# EAGLE board UDB5-Panel-v10 (EAGLE 6.4), part 1 of 4
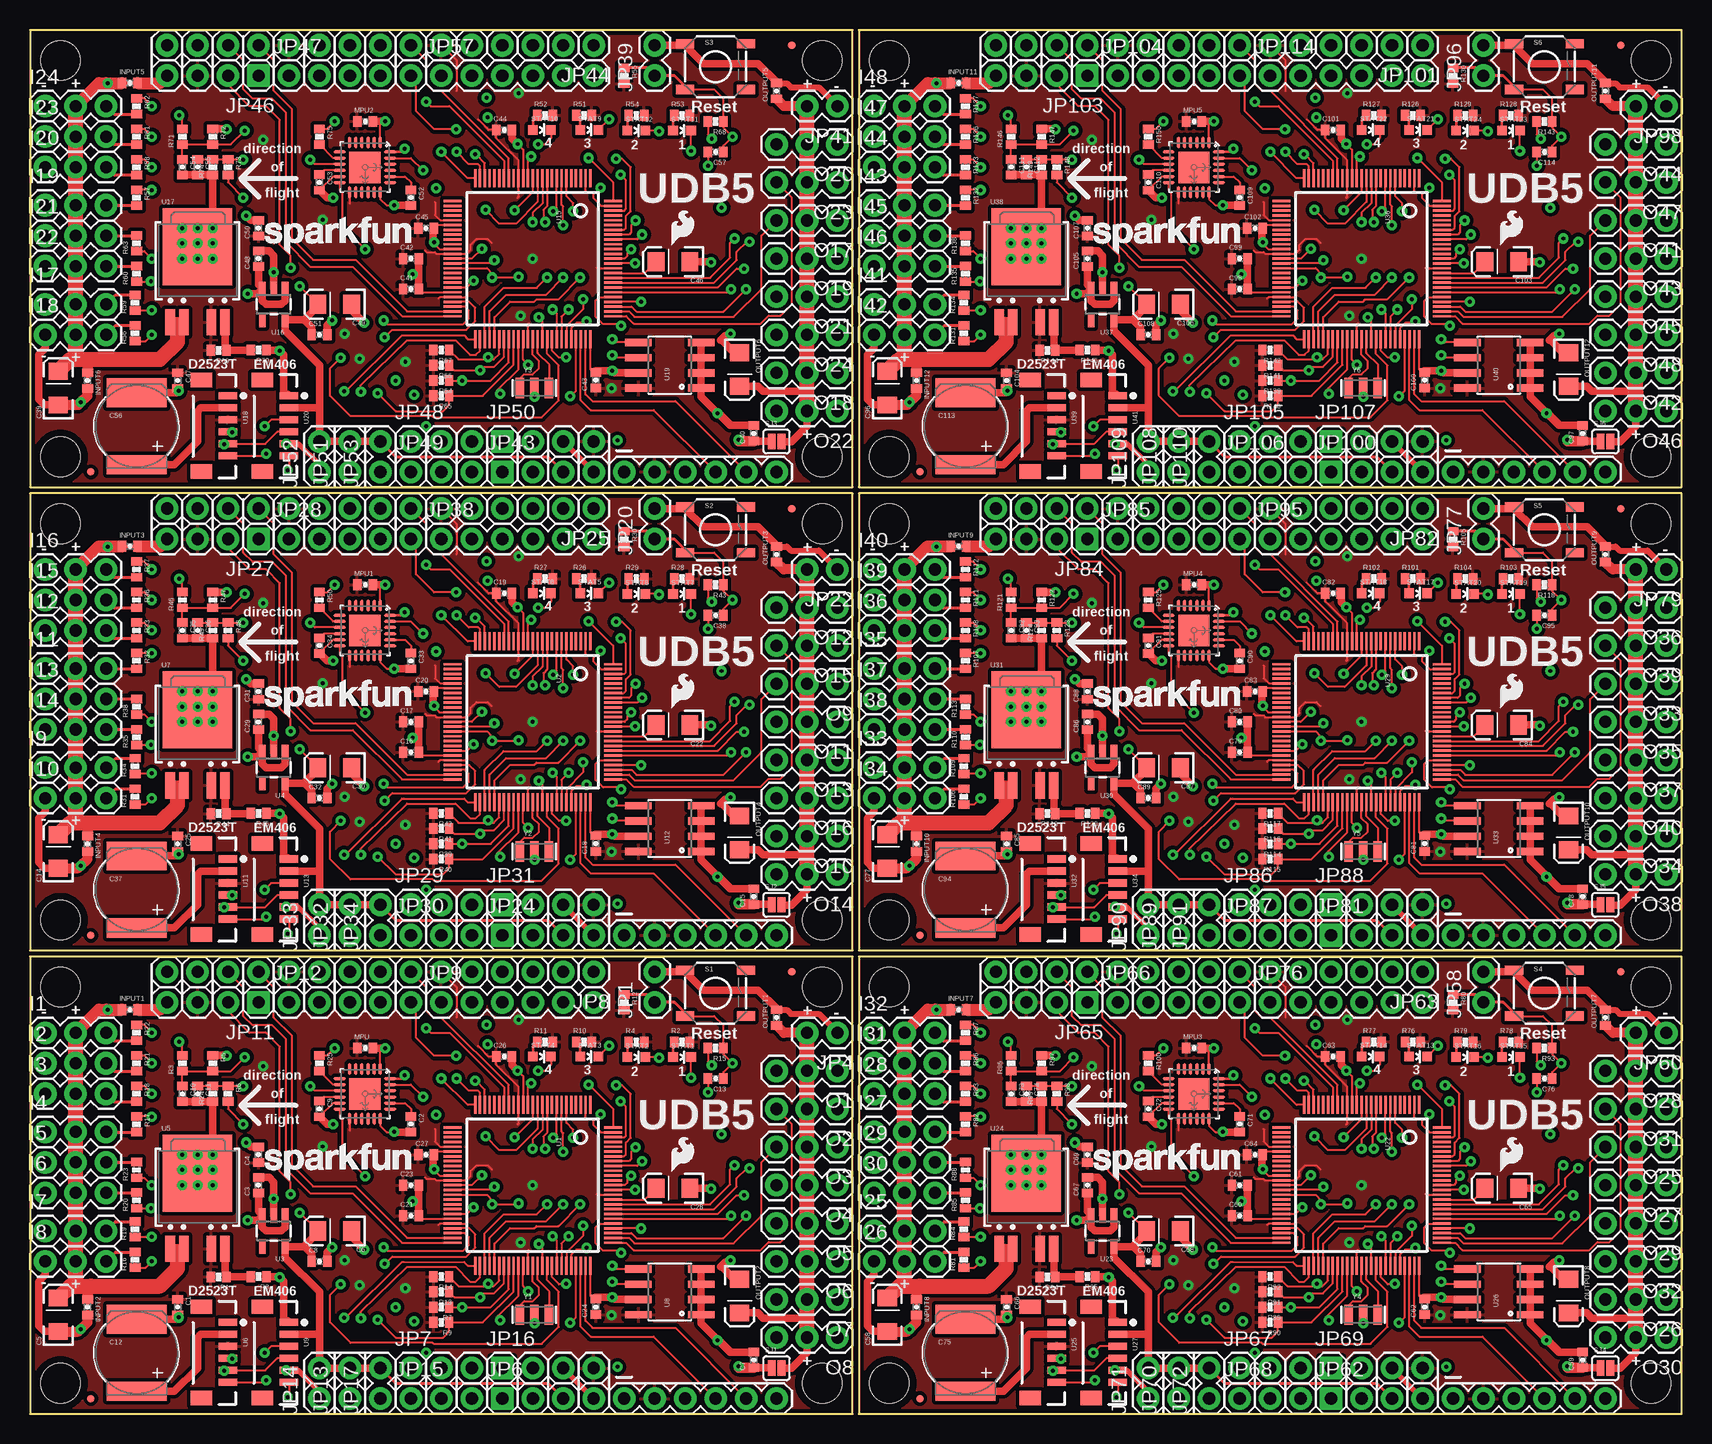
[diagram p0: board, top side]
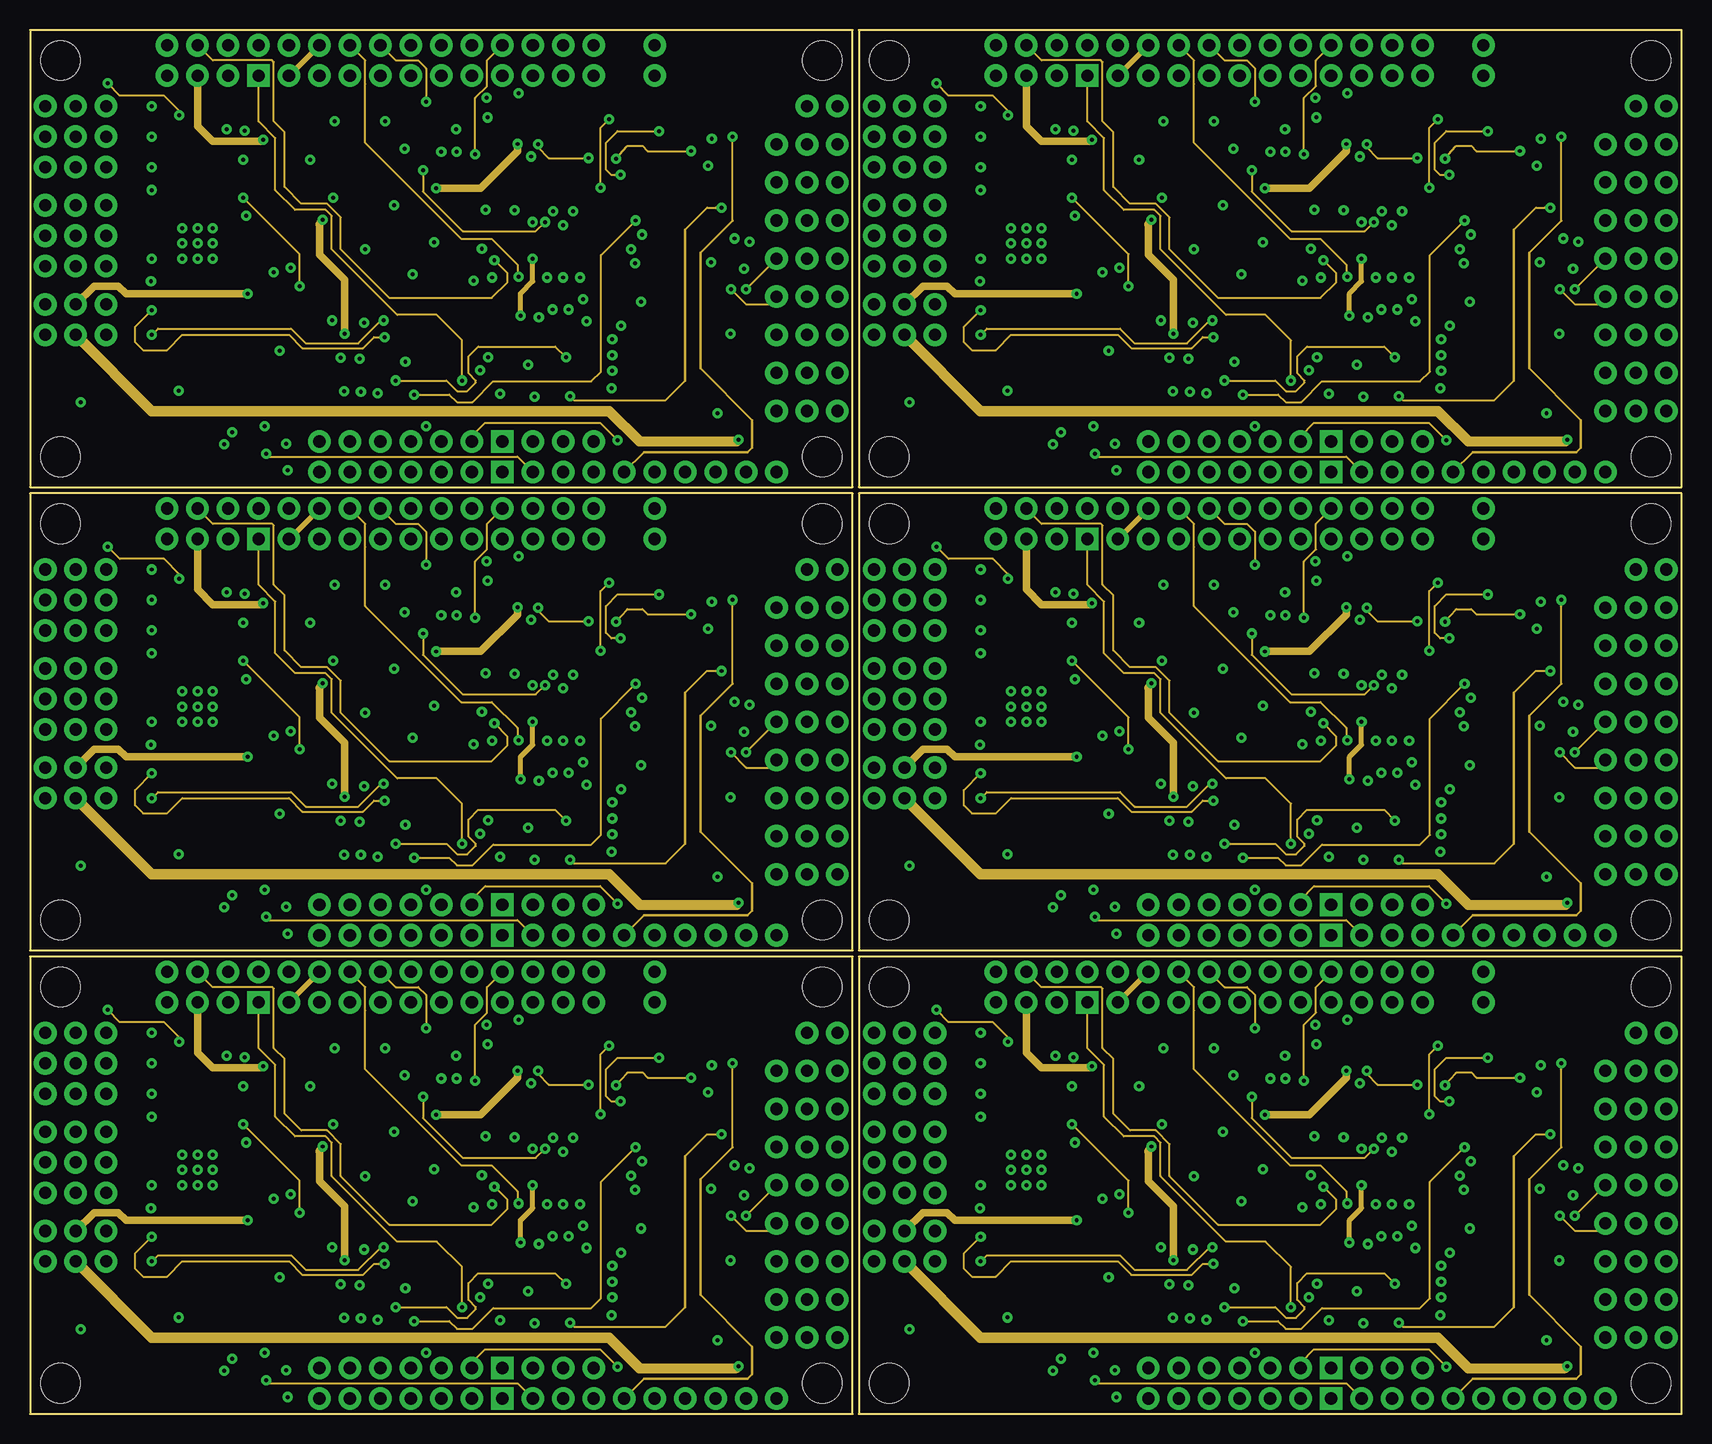
[diagram p1: board, inner layer Route5]
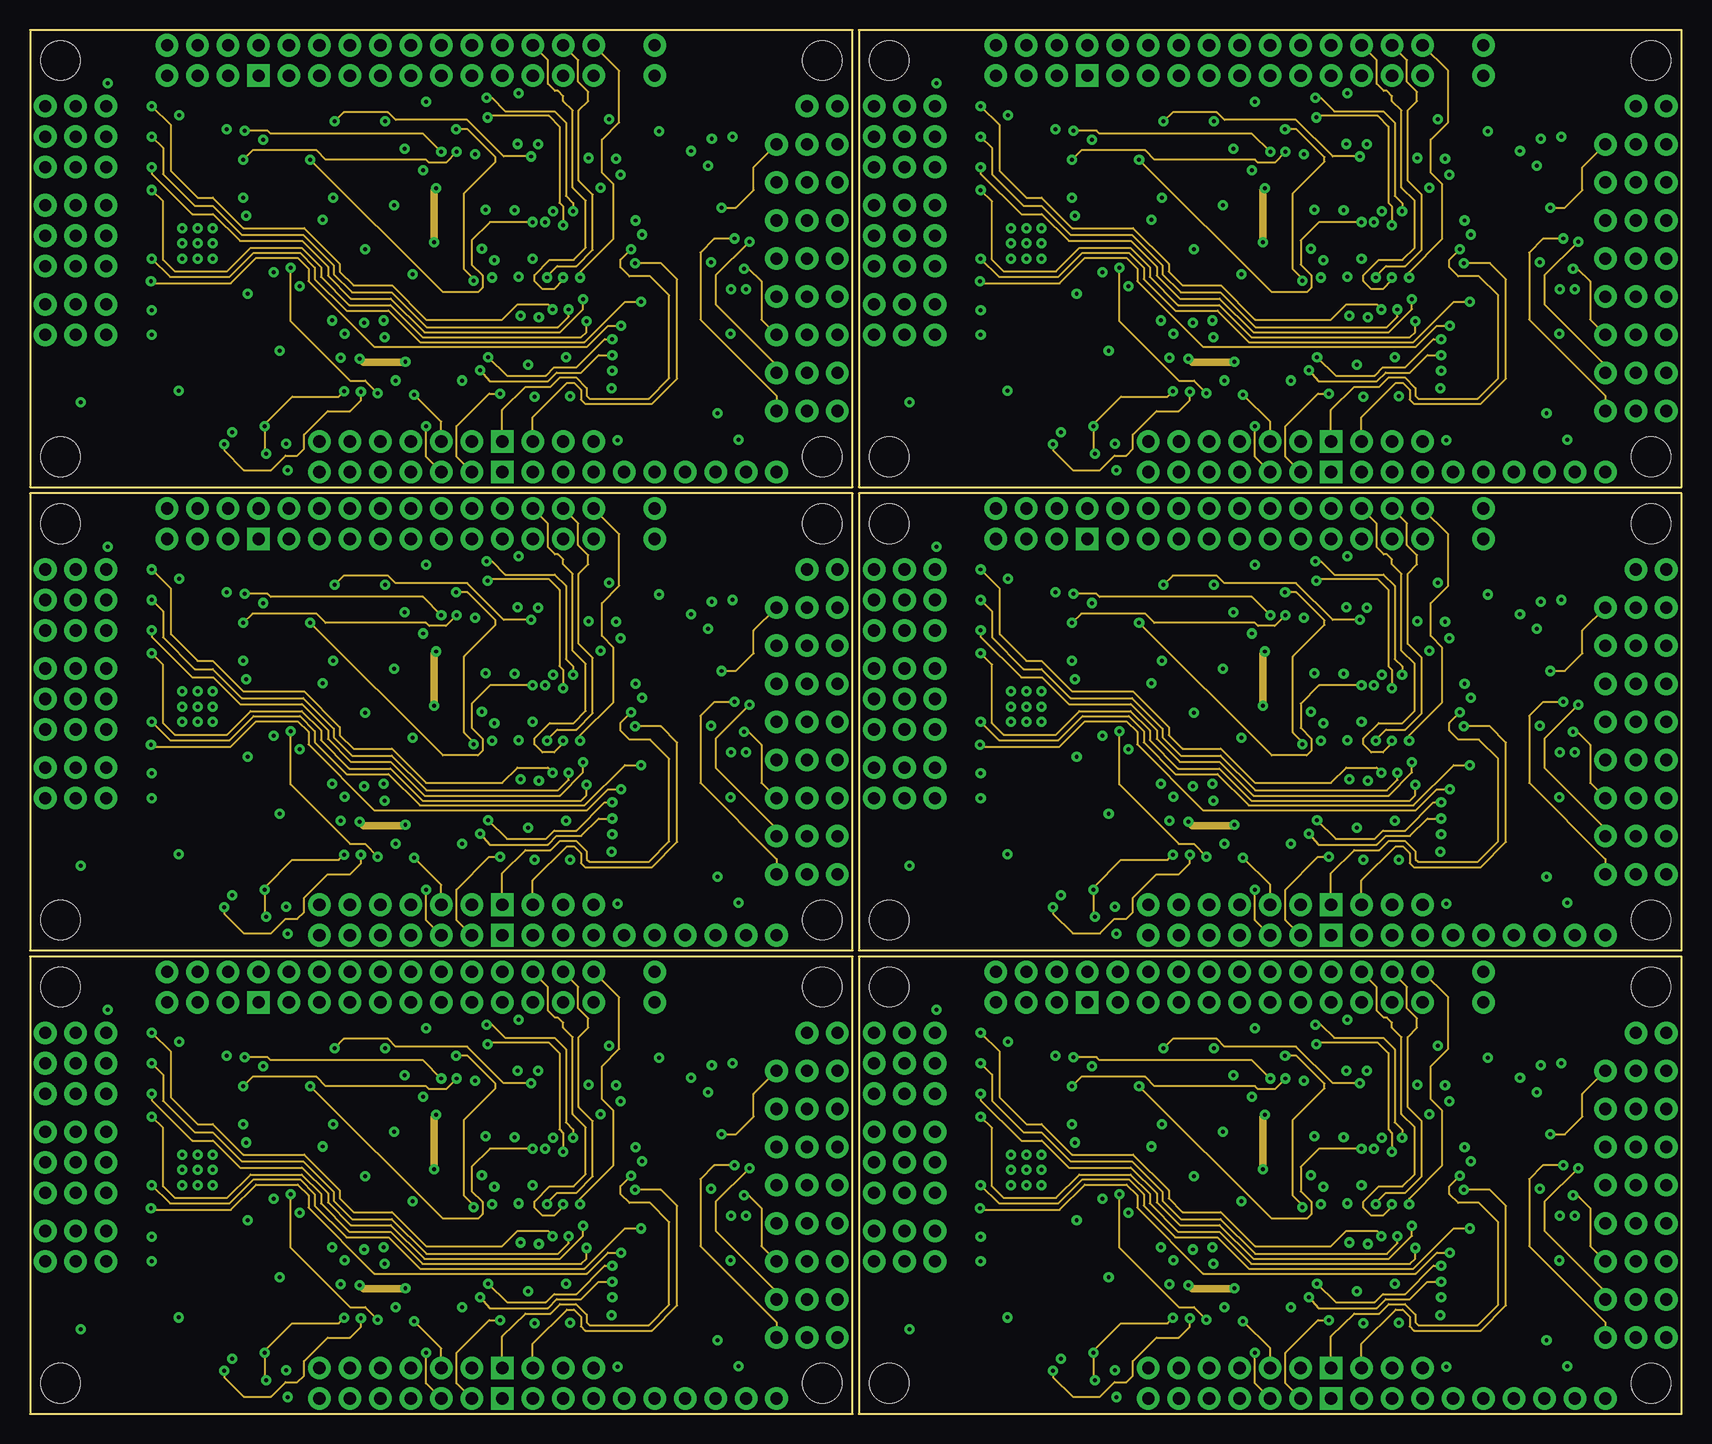
[diagram p2: board, inner layer Route10]
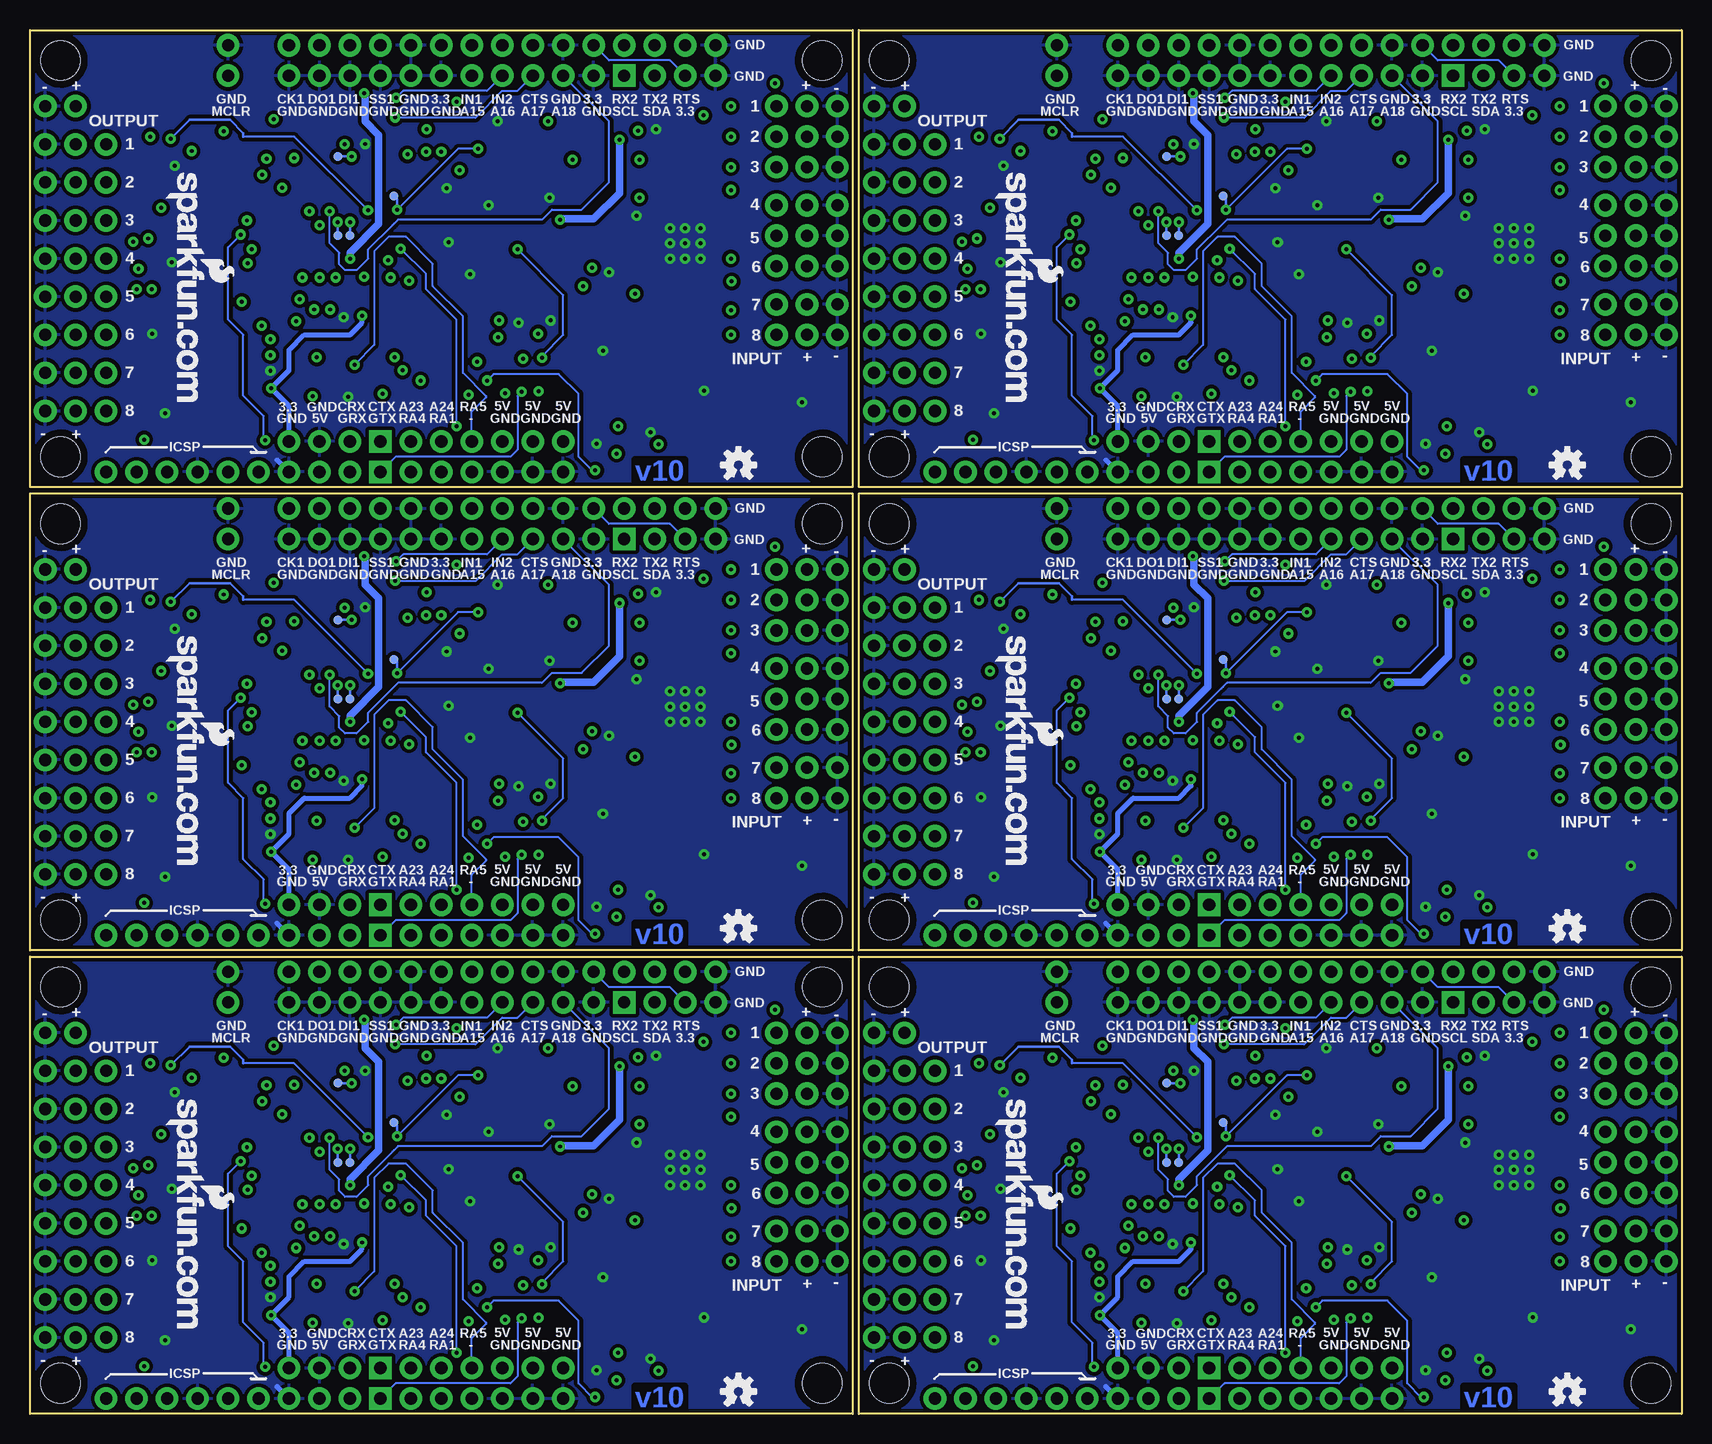
[diagram p3: board, bottom side, seen from below]

Size 137.67 x 115.32 mm. Coordinates in mm from the lower left corner, seen from the top.
Outline: 0,0 68.58,0 68.58,38.1 0,38.1 0,0
Outline: 0,38.61 68.58,38.61 68.58,76.71 0,76.71 0,38.61
Outline: 0,77.22 68.58,77.22 68.58,115.32 0,115.32 0,77.22
Outline: 69.09,0 137.67,0 137.67,38.1 69.09,38.1 69.09,0
Outline: 69.09,38.61 137.67,38.61 137.67,76.71 69.09,76.71 69.09,38.61
Outline: 69.09,77.22 137.67,77.22 137.67,115.32 69.09,115.32 69.09,77.22
Copper layers (1*5*10*16): Top 0.035mm / dielectric 1.5mm / Route5 0.035mm / dielectric 0.2mm / Route10 0.035mm / dielectric 0.15mm / Bottom 0.035mm
Design rules "BatchPCB-4-layer *": minimum track width 6mil, minimum drill 13mil, track to track 6mil, track to pad 6mil, pad to pad 6mil, via to via 6mil, smd to smd 6mil, copper to edge 6mil, drill to drill 8mil, minimum pad ring 12mil, minimum via ring 10mil, stop-mask expansion 4mil, vias tented up to drill 20mil, thermal gap 12mil
Net classes: 1 antenna: width 2.974 mm

## Footprints (pad centres in the part's own frame; a part is rotated, then mirrored left to right if it is on the bottom)
0402-CAP = smd 0.7 x 0.9: 1 -0.65,0; 2 0.65,0
EIA3216 = smd 1.4 x 1.6: A 1.4,0; C -1.4,0
EN_J2 = smd 5 x 1.6: + 0,-3.2 | smd 5 x 2.4: - 0,2.8
1X03 = drill 1.016 pad 1.88: 1 0,0; 2 2.54,0; 3 5.08,0
1X02 = drill 1.016 pad 1.88: 1 0,0; 2 2.54,0
1X06 = drill 1.016 pad 1.88: 1 0,0; 2 2.54,0; 3 5.08,0; 4 7.62,0; 5 10.16,0; 6 12.7,0
1X07 = drill 1.016 pad 1.88: 1 0,0; 2 2.54,0; 3 5.08,0; 4 7.62,0; 5 10.16,0; 6 12.7,0; 7 15.24,0
1X04 = drill 1.016 pad 1.88 square: 1 0,0 | drill 1.016 pad 1.88: 2 2.54,0; 3 5.08,0; 4 7.62,0
1X05 = drill 1.016 pad 1.88: 1 0,0; 2 2.54,0; 3 5.08,0; 4 7.62,0; 5 10.16,0
FIDUCIAL-1X2.5 = smd 0.635 x 0.635: 1 0,0
0402-RES = smd 0.7 x 0.9: 1 -0.65,0; 2 0.65,0
TACTILE_SWITCH_SMD = smd 1.524 x 0.762: 1 -2.54,1.905; 2 2.54,1.905; 3 -2.54,-1.905; 4 2.54,-1.905
SJ_2S = smd 0.635 x 1.27: 1 -0.412,0; 2 0.412,0
LED-0603 = smd 0.8 x 0.8: A 0,-0.75; C 0,0.75
PAD.03X.03 = smd 0.762 x 0.762: P$1 0,0
TQFP-100-12X12MM = smd 1.5 x 0.2: 1 -6.7,4.8; 2 -6.7,4.4; 3 -6.7,4; 4 -6.7,3.6; 5 -6.7,3.2; 6 -6.7,2.8; 7 -6.7,2.4; 8 -6.7,2; 9 -6.7,1.6; 10 -6.7,1.2; 11 -6.7,0.8; 12 -6.7,0.4; 13 -6.7,0; 14 -6.7,-0.4; 15 -6.7,-0.8; 16 -6.7,-1.2; 17 -6.7,-1.6; 18 -6.7,-2; 19 -6.7,-2.4; 20 -6.7,-2.8; 21 -6.7,-3.2; 22 -6.7,-3.6; 23 -6.7,-4; 24 -6.7,-4.4; 25 -6.7,-4.8; 51 6.7,-4.8; 52 6.7,-4.4; 53 6.7,-4; 54 6.7,-3.6; 55 6.7,-3.2; 56 6.7,-2.8; 57 6.7,-2.4; 58 6.7,-2; 59 6.7,-1.6; 60 6.7,-1.2; 61 6.7,-0.8; 62 6.7,-0.4; 63 6.7,0; 64 6.7,0.4; 65 6.7,0.8; 66 6.7,1.2; 67 6.7,1.6; 68 6.7,2; 69 6.7,2.4; 70 6.7,2.8; 71 6.7,3.2; 72 6.7,3.6; 73 6.7,4; 74 6.7,4.4; 75 6.7,4.8 | smd 0.2 x 1.5: 26 -4.8,-6.7; 27 -4.4,-6.7; 28 -4,-6.7; 29 -3.6,-6.7; 30 -3.2,-6.7; 31 -2.8,-6.7; 32 -2.4,-6.7; 33 -2,-6.7; 34 -1.6,-6.7; 35 -1.2,-6.7; 36 -0.8,-6.7; 37 -0.4,-6.7; 38 0,-6.7; 39 0.4,-6.7; 40 0.8,-6.7; 41 1.2,-6.7; 42 1.6,-6.7; 43 2,-6.7; 44 2.4,-6.7; 45 2.8,-6.7; 46 3.2,-6.7; 47 3.6,-6.7; 48 4,-6.7; 49 4.4,-6.7; 50 4.8,-6.7; 76 4.8,6.7; 77 4.4,6.7; 78 4,6.7; 79 3.6,6.7; 80 3.2,6.7; 81 2.8,6.7; 82 2.4,6.7; 83 2,6.7; 84 1.6,6.7; 85 1.2,6.7; 86 0.8,6.7; 87 0.4,6.7; 88 0,6.7; 89 -0.4,6.7; 90 -0.8,6.7; 91 -1.2,6.7; 92 -1.6,6.7; 93 -2,6.7; 94 -2.4,6.7; 95 -2.8,6.7; 96 -3.2,6.7; 97 -3.6,6.7; 98 -4,6.7; 99 -4.4,6.7; 100 -4.8,6.7
SOT23-5 = smd 0.55 x 1.2: 1 -0.95,-1.3; 2 0,-1.3; 3 0.95,-1.3; 4 0.95,1.3; 5 -0.95,1.3
DPAK-5 = smd 0.8 x 2.2: ADJ 2.28,-5.3; EN -2.28,-5.3; VIN -1.14,-5.3; VOUT 1.14,-5.3 | smd 5.8 x 6.4: GND 0,1
EM406 = smd 0.6 x 1.55: 1 0,0; 2 1,0; 3 2,0; 4 3,0; 5 4,0; 6 5,0 | smd 1.2 x 1.8: P$1 -1.3,-2.225; P$2 6.3,-2.225
SO08 = smd 0.61 x 2.21: 1 -1.905,-2.616; 2 -0.635,-2.616; 3 0.635,-2.616; 4 1.905,-2.616; 5 1.905,2.616; 6 0.635,2.616; 7 -0.635,2.616; 8 -1.905,2.616
QFN-24-TESTING = smd 1.016 x 0.254: 1 -2.066,1.257; 2 -2.066,0.75; 3 -2.066,0.247; 4 -2.066,-0.287; 5 -2.066,-0.792; 6 -2.066,-1.297; 13 2.086,-1.297; 14 2.086,-0.792; 15 2.086,-0.287; 16 2.086,0.247; 17 2.086,0.75; 18 2.086,1.257 | smd 0.254 x 1.016: 7 -1.267,-2.122; 8 -0.762,-2.122; 9 -0.258,-2.122; 10 0.278,-2.122; 11 0.78,-2.122; 12 1.287,-2.122; 19 1.287,2.082; 20 0.78,2.082; 21 0.278,2.082; 22 -0.258,2.082; 23 -0.762,2.082; 24 -1.267,2.082 | smd 2.616 x 2.616: P$1 0.02,-0.01
STAND-OFF = hole 3.302: 0,0
RESONATOR-SMD = smd 0.7 x 1.7: 1 -1.2,0; 2 0,0; 3 1.2,0

## Placement (x,y rotation side)
C1  1uF  [0402-CAP]  12.32,8.89 270 top
C2  2.2nF  [0402-CAP]  31.75,24.13 270 top
C3  1uF  [0402-CAP]  19.05,19.05 90 top
C4  0.1uF  [0402-CAP]  19.05,21.59 90 top
C5  10uF  [EIA3216]  2.36,8.26 90 top
C6  10uF  [EIA3216]  25.4,15.24 180 top
C7  0.1uF  [0402-CAP]  60.33,4.5 90 top
C8  0.1uF  [0402-CAP]  24.13,12.7 0 top
C9  0.1uF  [0402-CAP]  24.13,25.4 270 top
C10  22nF  [0402-CAP]  12.7,26.67 270 top
C11  22nF  [0402-CAP]  13.97,26.67 270 top
C12  0.2F/3.3V  [EN_J2]  8.89,5.08 0 top
C13  0.1uF  [0402-CAP]  57.15,27.94 180 top
C14  10uF  [EIA3216]  2.36,46.86 90 top
C15  0.1uF  [0402-CAP]  60.33,43.1 90 top
C16  0.1uF  [0402-CAP]  31.75,55.12 0 top
C17  0.1uF  [0402-CAP]  31.75,57.66 0 top
C18  0.1uF  [0402-CAP]  47.17,47.52 90 top
C19  0.1uF  [0402-CAP]  39.52,68.38 0 top
C20  0.1uF  [0402-CAP]  33.02,60.2 0 top
C21  0.1uF  [0402-CAP]  31.75,16.51 0 top
C22  10uF  [EIA3216]  53.59,57.4 180 top
C23  0.1uF  [0402-CAP]  31.75,19.05 0 top
C24  0.1uF  [0402-CAP]  47.17,8.92 90 top
C25  1uF  [0402-CAP]  12.32,47.5 270 top
C26  0.1uF  [0402-CAP]  39.52,29.77 0 top
C27  0.1uF  [0402-CAP]  33.02,21.59 0 top
C28  10uF  [EIA3216]  53.59,18.8 180 top
C29  1uF  [0402-CAP]  19.05,57.66 90 top
C30  10uF  [EIA3216]  25.4,53.85 180 top
C31  0.1uF  [0402-CAP]  19.05,60.2 90 top
C32  0.1uF  [0402-CAP]  24.13,51.31 0 top
C33  2.2nF  [0402-CAP]  31.75,62.74 270 top
C34  0.1uF  [0402-CAP]  24.13,64.01 270 top
C35  22nF  [0402-CAP]  12.7,65.28 270 top
C36  22nF  [0402-CAP]  13.97,65.28 270 top
C37  0.2F/3.3V  [EN_J2]  8.89,43.69 0 top
C38  0.1uF  [0402-CAP]  57.15,66.55 180 top
C39  10uF  [EIA3216]  2.36,85.47 90 top
C40  0.1uF  [0402-CAP]  60.33,81.71 90 top
C41  0.1uF  [0402-CAP]  31.75,93.73 0 top
C42  0.1uF  [0402-CAP]  31.75,96.27 0 top
C43  0.1uF  [0402-CAP]  47.17,86.13 90 top
C44  0.1uF  [0402-CAP]  39.52,106.98 0 top
C45  0.1uF  [0402-CAP]  33.02,98.81 0 top
C46  10uF  [EIA3216]  53.59,96.01 180 top
C47  1uF  [0402-CAP]  12.32,86.11 270 top
C48  1uF  [0402-CAP]  19.05,96.27 90 top
C49  10uF  [EIA3216]  25.4,92.46 180 top
C50  0.1uF  [0402-CAP]  19.05,98.81 90 top
C51  0.1uF  [0402-CAP]  24.13,89.92 0 top
C52  2.2nF  [0402-CAP]  31.75,101.35 270 top
C53  0.1uF  [0402-CAP]  24.13,102.62 270 top
C54  22nF  [0402-CAP]  12.7,103.89 270 top
C55  22nF  [0402-CAP]  13.97,103.89 270 top
C56  0.2F/3.3V  [EN_J2]  8.89,82.3 0 top
C57  0.1uF  [0402-CAP]  57.15,105.16 180 top
C58  10uF  [EIA3216]  71.45,8.26 90 top
C59  0.1uF  [0402-CAP]  129.41,4.5 90 top
C60  0.1uF  [0402-CAP]  100.84,16.51 0 top
C61  0.1uF  [0402-CAP]  100.84,19.05 0 top
C62  0.1uF  [0402-CAP]  116.26,8.92 90 top
C63  0.1uF  [0402-CAP]  108.61,29.77 0 top
C64  0.1uF  [0402-CAP]  102.11,21.59 0 top
C65  10uF  [EIA3216]  122.68,18.8 180 top
C66  1uF  [0402-CAP]  81.41,8.89 270 top
C67  1uF  [0402-CAP]  88.14,19.05 90 top
C68  10uF  [EIA3216]  94.49,15.24 180 top
C69  0.1uF  [0402-CAP]  88.14,21.59 90 top
C70  0.1uF  [0402-CAP]  93.22,12.7 0 top
C71  2.2nF  [0402-CAP]  100.84,24.13 270 top
C72  0.1uF  [0402-CAP]  93.22,25.4 270 top
C73  22nF  [0402-CAP]  81.79,26.67 270 top
C74  22nF  [0402-CAP]  83.06,26.67 270 top
C75  0.2F/3.3V  [EN_J2]  77.98,5.08 0 top
C76  0.1uF  [0402-CAP]  126.24,27.94 180 top
C77  10uF  [EIA3216]  71.45,46.86 90 top
C78  0.1uF  [0402-CAP]  129.41,43.1 90 top
C79  0.1uF  [0402-CAP]  100.84,55.12 0 top
C80  0.1uF  [0402-CAP]  100.84,57.66 0 top
C81  0.1uF  [0402-CAP]  116.26,47.52 90 top
C82  0.1uF  [0402-CAP]  108.61,68.38 0 top
C83  0.1uF  [0402-CAP]  102.11,60.2 0 top
C84  10uF  [EIA3216]  122.68,57.4 180 top
C85  1uF  [0402-CAP]  81.41,47.5 270 top
C86  1uF  [0402-CAP]  88.14,57.66 90 top
C87  10uF  [EIA3216]  94.49,53.85 180 top
C88  0.1uF  [0402-CAP]  88.14,60.2 90 top
C89  0.1uF  [0402-CAP]  93.22,51.31 0 top
C90  2.2nF  [0402-CAP]  100.84,62.74 270 top
C91  0.1uF  [0402-CAP]  93.22,64.01 270 top
C92  22nF  [0402-CAP]  81.79,65.28 270 top
C93  22nF  [0402-CAP]  83.06,65.28 270 top
C94  0.2F/3.3V  [EN_J2]  77.98,43.69 0 top
C95  0.1uF  [0402-CAP]  126.24,66.55 180 top
C96  10uF  [EIA3216]  71.45,85.47 90 top
C97  0.1uF  [0402-CAP]  129.41,81.71 90 top
C98  0.1uF  [0402-CAP]  100.84,93.73 0 top
C99  0.1uF  [0402-CAP]  100.84,96.27 0 top
C100  0.1uF  [0402-CAP]  116.26,86.13 90 top
C101  0.1uF  [0402-CAP]  108.61,106.98 0 top
C102  0.1uF  [0402-CAP]  102.11,98.81 0 top
C103  10uF  [EIA3216]  122.68,96.01 180 top
C104  1uF  [0402-CAP]  81.41,86.11 270 top
C105  1uF  [0402-CAP]  88.14,96.27 90 top
C106  10uF  [EIA3216]  94.49,92.46 180 top
C107  0.1uF  [0402-CAP]  88.14,98.81 90 top
C108  0.1uF  [0402-CAP]  93.22,89.92 0 top
C109  2.2nF  [0402-CAP]  100.84,101.35 270 top
C110  0.1uF  [0402-CAP]  93.22,102.62 270 top
C111  22nF  [0402-CAP]  81.79,103.89 270 top
C112  22nF  [0402-CAP]  83.06,103.89 270 top
C113  0.2F/3.3V  [EN_J2]  77.98,82.3 0 top
C114  0.1uF  [0402-CAP]  126.24,105.16 180 top
I1  S  [1X03]  1.27,31.75 0 top
I2  S  [1X03]  1.27,29.21 0 top
I3  S  [1X03]  1.27,26.67 0 top
I4  S  [1X03]  1.27,23.5 0 top
I5  S  [1X03]  1.27,20.95 0 top
I6  S  [1X03]  1.27,18.41 0 top
I7  S  [1X03]  1.27,15.24 0 top
I8  S  [1X03]  1.27,12.7 0 top
I9  S  [1X03]  1.27,53.85 0 top
I10  S  [1X03]  1.27,51.31 0 top
I11  S  [1X03]  1.27,62.1 0 top
I12  S  [1X03]  1.27,65.28 0 top
I13  S  [1X03]  1.27,59.56 0 top
I14  S  [1X03]  1.27,57.02 0 top
I15  S  [1X03]  1.27,67.82 0 top
I16  S  [1X03]  1.27,70.36 0 top
I17  S  [1X03]  1.27,92.46 0 top
I18  S  [1X03]  1.27,89.92 0 top
I19  S  [1X03]  1.27,100.71 0 top
I20  S  [1X03]  1.27,103.89 0 top
I21  S  [1X03]  1.27,98.17 0 top
I22  S  [1X03]  1.27,95.63 0 top
I23  S  [1X03]  1.27,106.43 0 top
I24  S  [1X03]  1.27,108.97 0 top
I25  S  [1X03]  70.36,15.24 0 top
I26  S  [1X03]  70.36,12.7 0 top
I27  S  [1X03]  70.36,23.5 0 top
I28  S  [1X03]  70.36,26.67 0 top
I29  S  [1X03]  70.36,20.95 0 top
I30  S  [1X03]  70.36,18.41 0 top
I31  S  [1X03]  70.36,29.21 0 top
I32  S  [1X03]  70.36,31.75 0 top
I33  S  [1X03]  70.36,53.85 0 top
I34  S  [1X03]  70.36,51.31 0 top
I35  S  [1X03]  70.36,62.1 0 top
I36  S  [1X03]  70.36,65.28 0 top
I37  S  [1X03]  70.36,59.56 0 top
I38  S  [1X03]  70.36,57.02 0 top
I39  S  [1X03]  70.36,67.82 0 top
I40  S  [1X03]  70.36,70.36 0 top
I41  S  [1X03]  70.36,92.46 0 top
I42  S  [1X03]  70.36,89.92 0 top
I43  S  [1X03]  70.36,100.71 0 top
I44  S  [1X03]  70.36,103.89 0 top
I45  S  [1X03]  70.36,98.17 0 top
I46  S  [1X03]  70.36,95.63 0 top
I47  S  [1X03]  70.36,106.43 0 top
I48  S  [1X03]  70.36,108.97 0 top
INPUT1  0.1uF  [0402-CAP]  8.32,33.68 0 top
INPUT2  0.1uF  [0402-CAP]  4.8,8.89 270 top
INPUT3  0.1uF  [0402-CAP]  8.32,72.29 0 top
INPUT4  0.1uF  [0402-CAP]  4.8,47.5 270 top
INPUT5  0.1uF  [0402-CAP]  8.32,110.9 0 top
INPUT6  0.1uF  [0402-CAP]  4.8,86.11 270 top
INPUT7  0.1uF  [0402-CAP]  77.41,33.68 0 top
INPUT8  0.1uF  [0402-CAP]  73.89,8.89 270 top
INPUT9  0.1uF  [0402-CAP]  77.41,72.29 0 top
INPUT10  0.1uF  [0402-CAP]  73.89,47.5 270 top
INPUT11  0.1uF  [0402-CAP]  77.41,110.9 0 top
INPUT12  0.1uF  [0402-CAP]  73.89,86.11 270 top
JP1  EXT_Reset  [1X02]  52.07,34.29 90 top
JP2  prog  [1X06]  62.23,1.27 180 top
JP3  LOGO-SFENEW  [SFE-NEW-WEBLOGO]  57.23,26.16 270 bottom
JP4  SVCC  [1X02]  67.31,31.75 180 top
JP5  ST  [1X07]  11.43,36.83 0 top
JP6  SG  [1X04]  39.37,1.27 0 top
JP7  extra  [1X03]  31.75,3.81 0 top
JP8  SPI1  [1X06]  46.99,36.83 180 top
JP9  GND  [1X06]  34.29,34.29 0 top
JP10  INT  [1X02]  29.21,36.83 0 top
JP11  I2C  [1X04]  19.05,34.29 180 top
JP12  ACOM1  [1X05]  21.59,34.29 0 top
JP13  power  [1X02]  26.67,1.27 90 top
JP14  power  [1X02]  24.13,1.27 90 top
JP15  extra  [1X03]  31.75,1.27 0 top
JP16  extra  [1X04]  39.37,3.81 0 top
JP17  power  [1X02]  29.21,1.27 90 top
JP18  FIDUCIAL1X2.5  [FIDUCIAL-1X2.5]  5.08,1.27 0 top
JP19  FIDUCIAL1X2.5  [FIDUCIAL-1X2.5]  63.5,36.83 0 top
JP20  EXT_Reset  [1X02]  52.07,72.9 90 top
JP21  prog  [1X06]  62.23,39.88 180 top
JP22  SVCC  [1X02]  67.31,70.36 180 top
JP23  ST  [1X07]  11.43,75.44 0 top
JP24  SG  [1X04]  39.37,39.88 0 top
JP25  SPI1  [1X06]  46.99,75.44 180 top
JP26  INT  [1X02]  29.21,75.44 0 top
JP27  I2C  [1X04]  19.05,72.9 180 top
JP28  ACOM1  [1X05]  21.59,72.9 0 top
JP29  extra  [1X03]  31.75,42.42 0 top
JP30  extra  [1X03]  31.75,39.88 0 top
JP31  extra  [1X04]  39.37,42.42 0 top
JP32  power  [1X02]  26.67,39.88 90 top
JP33  power  [1X02]  24.13,39.88 90 top
JP34  power  [1X02]  29.21,39.88 90 top
JP35  LOGO-SFENEW  [SFE-NEW-WEBLOGO]  57.23,64.77 270 bottom
JP36  FIDUCIAL1X2.5  [FIDUCIAL-1X2.5]  5.08,39.88 0 top
JP37  FIDUCIAL1X2.5  [FIDUCIAL-1X2.5]  63.5,75.44 0 top
JP38  GND  [1X06]  34.29,72.9 0 top
JP39  EXT_Reset  [1X02]  52.07,111.51 90 top
JP40  prog  [1X06]  62.23,78.49 180 top
JP41  SVCC  [1X02]  67.31,108.97 180 top
JP42  ST  [1X07]  11.43,114.05 0 top
JP43  SG  [1X04]  39.37,78.49 0 top
JP44  SPI1  [1X06]  46.99,114.05 180 top
JP45  INT  [1X02]  29.21,114.05 0 top
JP46  I2C  [1X04]  19.05,111.51 180 top
JP47  ACOM1  [1X05]  21.59,111.51 0 top
JP48  extra  [1X03]  31.75,81.03 0 top
JP49  extra  [1X03]  31.75,78.49 0 top
JP50  extra  [1X04]  39.37,81.03 0 top
JP51  power  [1X02]  26.67,78.49 90 top
JP52  power  [1X02]  24.13,78.49 90 top
JP53  power  [1X02]  29.21,78.49 90 top
JP54  LOGO-SFENEW  [SFE-NEW-WEBLOGO]  57.23,103.38 270 bottom
JP55  FIDUCIAL1X2.5  [FIDUCIAL-1X2.5]  5.08,78.49 0 top
JP56  FIDUCIAL1X2.5  [FIDUCIAL-1X2.5]  63.5,114.05 0 top
JP57  GND  [1X06]  34.29,111.51 0 top
JP58  EXT_Reset  [1X02]  121.16,34.29 90 top
JP59  prog  [1X06]  131.32,1.27 180 top
JP60  SVCC  [1X02]  136.4,31.75 180 top
JP61  ST  [1X07]  80.52,36.83 0 top
JP62  SG  [1X04]  108.46,1.27 0 top
JP63  SPI1  [1X06]  116.08,36.83 180 top
JP64  INT  [1X02]  98.3,36.83 0 top
JP65  I2C  [1X04]  88.14,34.29 180 top
JP66  ACOM1  [1X05]  90.68,34.29 0 top
JP67  extra  [1X03]  100.84,3.81 0 top
JP68  extra  [1X03]  100.84,1.27 0 top
JP69  extra  [1X04]  108.46,3.81 0 top
JP70  power  [1X02]  95.76,1.27 90 top
JP71  power  [1X02]  93.22,1.27 90 top
JP72  power  [1X02]  98.3,1.27 90 top
JP73  LOGO-SFENEW  [SFE-NEW-WEBLOGO]  126.31,26.16 270 bottom
JP74  FIDUCIAL1X2.5  [FIDUCIAL-1X2.5]  74.17,1.27 0 top
JP75  FIDUCIAL1X2.5  [FIDUCIAL-1X2.5]  132.59,36.83 0 top
JP76  GND  [1X06]  103.38,34.29 0 top
JP77  EXT_Reset  [1X02]  121.16,72.9 90 top
JP78  prog  [1X06]  131.32,39.88 180 top
JP79  SVCC  [1X02]  136.4,70.36 180 top
JP80  ST  [1X07]  80.52,75.44 0 top
JP81  SG  [1X04]  108.46,39.88 0 top
JP82  SPI1  [1X06]  116.08,75.44 180 top
JP83  INT  [1X02]  98.3,75.44 0 top
JP84  I2C  [1X04]  88.14,72.9 180 top
JP85  ACOM1  [1X05]  90.68,72.9 0 top
JP86  extra  [1X03]  100.84,42.42 0 top
JP87  extra  [1X03]  100.84,39.88 0 top
JP88  extra  [1X04]  108.46,42.42 0 top
JP89  power  [1X02]  95.76,39.88 90 top
JP90  power  [1X02]  93.22,39.88 90 top
JP91  power  [1X02]  98.3,39.88 90 top
JP92  LOGO-SFENEW  [SFE-NEW-WEBLOGO]  126.31,64.77 270 bottom
JP93  FIDUCIAL1X2.5  [FIDUCIAL-1X2.5]  74.17,39.88 0 top
JP94  FIDUCIAL1X2.5  [FIDUCIAL-1X2.5]  132.59,75.44 0 top
JP95  GND  [1X06]  103.38,72.9 0 top
JP96  EXT_Reset  [1X02]  121.16,111.51 90 top
JP97  prog  [1X06]  131.32,78.49 180 top
JP98  SVCC  [1X02]  136.4,108.97 180 top
JP99  ST  [1X07]  80.52,114.05 0 top
JP100  SG  [1X04]  108.46,78.49 0 top
JP101  SPI1  [1X06]  116.08,114.05 180 top
JP102  INT  [1X02]  98.3,114.05 0 top
JP103  I2C  [1X04]  88.14,111.51 180 top
JP104  ACOM1  [1X05]  90.68,111.51 0 top
JP105  extra  [1X03]  100.84,81.03 0 top
JP106  extra  [1X03]  100.84,78.49 0 top
JP107  extra  [1X04]  108.46,81.03 0 top
JP108  power  [1X02]  95.76,78.49 90 top
JP109  power  [1X02]  93.22,78.49 90 top
JP110  power  [1X02]  98.3,78.49 90 top
JP111  LOGO-SFENEW  [SFE-NEW-WEBLOGO]  126.31,103.38 270 bottom
JP112  FIDUCIAL1X2.5  [FIDUCIAL-1X2.5]  74.17,78.49 0 top
JP113  FIDUCIAL1X2.5  [FIDUCIAL-1X2.5]  132.59,114.05 0 top
JP114  GND  [1X06]  103.38,111.51 0 top
LOGO1  LOGO-SFENW2  [SFE-NEW-WEB]  19.56,19.43 0 top
LOGO2  LOGO-SFENW2  [SFE-NEW-WEB]  19.56,58.04 0 top
LOGO3  LOGO-SFENW2  [SFE-NEW-WEB]  19.56,96.65 0 top
LOGO4  LOGO-SFENW2  [SFE-NEW-WEB]  88.65,19.43 0 top
LOGO5  LOGO-SFENW2  [SFE-NEW-WEB]  88.65,58.04 0 top
LOGO6  LOGO-SFENW2  [SFE-NEW-WEB]  88.65,96.65 0 top
MPU  0.1uF  [0402-CAP]  27.94,30.48 0 top
MPU1  0.1uF  [0402-CAP]  27.94,69.09 0 top
MPU2  0.1uF  [0402-CAP]  27.94,107.7 0 top
MPU3  0.1uF  [0402-CAP]  97.03,30.48 0 top
MPU4  0.1uF  [0402-CAP]  97.03,69.09 0 top
MPU5  0.1uF  [0402-CAP]  97.03,107.7 0 top
O1  RA  [1X03]  67.31,28.57 180 top
O2  RA  [1X03]  67.31,25.4 180 top
O3  RA  [1X03]  67.31,22.23 180 top
O4  RA  [1X03]  67.31,19.05 180 top
O5  RA  [1X03]  67.31,15.88 180 top
O6  RA  [1X03]  67.31,12.7 180 top
O7  RA  [1X03]  67.31,9.53 180 top
O8  RA  [1X03]  67.31,6.35 180 top
O9  RA  [1X03]  67.31,60.83 180 top
O10  RA  [1X03]  67.31,48.13 180 top
O11  RA  [1X03]  67.31,57.66 180 top
O12  RA  [1X03]  67.31,67.18 180 top
O13  RA  [1X03]  67.31,54.48 180 top
O14  RA  [1X03]  67.31,44.96 180 top
O15  RA  [1X03]  67.31,64.01 180 top
O16  RA  [1X03]  67.31,51.31 180 top
O17  RA  [1X03]  67.31,99.44 180 top
O18  RA  [1X03]  67.31,86.74 180 top
O19  RA  [1X03]  67.31,96.27 180 top
O20  RA  [1X03]  67.31,105.79 180 top
O21  RA  [1X03]  67.31,93.09 180 top
O22  RA  [1X03]  67.31,83.57 180 top
O23  RA  [1X03]  67.31,102.62 180 top
O24  RA  [1X03]  67.31,89.92 180 top
O25  RA  [1X03]  136.4,22.23 180 top
O26  RA  [1X03]  136.4,9.53 180 top
O27  RA  [1X03]  136.4,19.05 180 top
O28  RA  [1X03]  136.4,28.57 180 top
O29  RA  [1X03]  136.4,15.88 180 top
O30  RA  [1X03]  136.4,6.35 180 top
O31  RA  [1X03]  136.4,25.4 180 top
O32  RA  [1X03]  136.4,12.7 180 top
O33  RA  [1X03]  136.4,60.83 180 top
O34  RA  [1X03]  136.4,48.13 180 top
O35  RA  [1X03]  136.4,57.66 180 top
O36  RA  [1X03]  136.4,67.18 180 top
O37  RA  [1X03]  136.4,54.48 180 top
O38  RA  [1X03]  136.4,44.96 180 top
O39  RA  [1X03]  136.4,64.01 180 top
O40  RA  [1X03]  136.4,51.31 180 top
O41  RA  [1X03]  136.4,99.44 180 top
O42  RA  [1X03]  136.4,86.74 180 top
O43  RA  [1X03]  136.4,96.27 180 top
O44  RA  [1X03]  136.4,105.79 180 top
O45  RA  [1X03]  136.4,93.09 180 top
O46  RA  [1X03]  136.4,83.57 180 top
O47  RA  [1X03]  136.4,102.62 180 top
O48  RA  [1X03]  136.4,89.92 180 top
OUTPUT1  0.1uF  [0402-CAP]  62.23,33.02 90 top
OUTPUT2  10uF  [EIA3216]  59.16,9.8 270 top
OUTPUT3  0.1uF  [0402-CAP]  62.23,71.63 90 top
OUTPUT4  10uF  [EIA3216]  59.16,48.41 270 top
OUTPUT5  0.1uF  [0402-CAP]  62.23,110.24 90 top
OUTPUT6  10uF  [EIA3216]  59.16,87.02 270 top
OUTPUT7  0.1uF  [0402-CAP]  131.32,33.02 90 top
OUTPUT8  10uF  [EIA3216]  128.24,9.8 270 top
OUTPUT9  0.1uF  [0402-CAP]  131.32,71.63 90 top
OUTPUT10  10uF  [EIA3216]  128.24,48.41 270 top
OUTPUT11  0.1uF  [0402-CAP]  131.32,110.24 90 top
OUTPUT12  10uF  [EIA3216]  128.24,87.02 270 top
R1  20k  [0402-RES]  15.72,11.4 180 top
R2  330  [0402-RES]  54.36,30.99 0 top
R3  10k  [0402-RES]  12.7,29.21 90 top
R4  330  [0402-RES]  50.55,30.99 0 top
R5  10k  [0402-RES]  15.24,29.21 270 top
R6  10k  [0402-RES]  16.51,26.67 270 top
R7  4.7k  [0402-RES]  34.29,8.89 180 top
R8  12.1k  [0402-RES]  19.05,11.43 180 top
R9  4.7k  [0402-RES]  34.29,7.62 180 top
R10  330  [0402-RES]  46.18,30.99 0 top
R11  330  [0402-RES]  42.93,30.99 0 top
R12  10k  [0402-RES]  49.53,34.29 270 top
R13  4.7k  [0402-RES]  34.29,10.16 180 top
R14  4.7k  [0402-RES]  34.29,11.43 180 top
R15  470  [0402-RES]  57.15,30.48 180 top
R16  330  [0402-RES]  8.76,12.83 90 top
R17  330  [0402-RES]  8.89,24.13 270 top
R18  330  [0402-RES]  8.89,26.67 270 top
R19  330  [0402-RES]  8.76,15.37 90 top
R20  330  [0402-RES]  8.89,17.78 90 top
R21  330  [0402-RES]  8.89,29.21 270 top
R22  330  [0402-RES]  8.89,31.75 270 top
R23  330  [0402-RES]  8.89,20.32 90 top
R24  10k  [0402-RES]  15.24,26.67 90 top
R25  1k  [0402-RES]  24.13,29.21 270 top
R26  330  [0402-RES]  46.18,69.6 0 top
R27  330  [0402-RES]  42.93,69.6 0 top
R28  330  [0402-RES]  54.36,69.6 0 top
R29  330  [0402-RES]  50.55,69.6 0 top
R30  10k  [0402-RES]  49.53,72.9 270 top
R31  330  [0402-RES]  8.76,51.44 90 top
R32  330  [0402-RES]  8.89,62.74 270 top
R33  330  [0402-RES]  8.89,65.28 270 top
R34  330  [0402-RES]  8.76,53.98 90 top
R35  330  [0402-RES]  8.89,56.39 90 top
R36  330  [0402-RES]  8.89,67.82 270 top
R37  330  [0402-RES]  8.89,70.36 270 top
R38  330  [0402-RES]  8.89,58.93 90 top
R39  4.7k  [0402-RES]  34.29,47.5 180 top
R40  4.7k  [0402-RES]  34.29,46.23 180 top
R41  4.7k  [0402-RES]  34.29,48.77 180 top
R42  4.7k  [0402-RES]  34.29,50.04 180 top
R43  470  [0402-RES]  57.15,69.09 180 top
R44  20k  [0402-RES]  15.72,50.01 180 top
R45  12.1k  [0402-RES]  19.05,50.04 180 top
R46  10k  [0402-RES]  12.7,67.82 90 top
R47  10k  [0402-RES]  15.24,67.82 270 top
R48  10k  [0402-RES]  16.51,65.28 270 top
R49  10k  [0402-RES]  15.24,65.28 90 top
R50  1k  [0402-RES]  24.13,67.82 270 top
R51  330  [0402-RES]  46.18,108.2 0 top
R52  330  [0402-RES]  42.93,108.2 0 top
R53  330  [0402-RES]  54.36,108.2 0 top
R54  330  [0402-RES]  50.55,108.2 0 top
R55  10k  [0402-RES]  49.53,111.51 270 top
R56  330  [0402-RES]  8.76,90.04 90 top
R57  330  [0402-RES]  8.89,101.35 270 top
R58  330  [0402-RES]  8.89,103.89 270 top
R59  330  [0402-RES]  8.76,92.58 90 top
R60  330  [0402-RES]  8.89,95 90 top
R61  330  [0402-RES]  8.89,106.43 270 top
R62  330  [0402-RES]  8.89,108.97 270 top
R63  330  [0402-RES]  8.89,97.54 90 top
R64  4.7k  [0402-RES]  34.29,86.11 180 top
R65  4.7k  [0402-RES]  34.29,84.84 180 top
R66  4.7k  [0402-RES]  34.29,87.38 180 top
R67  4.7k  [0402-RES]  34.29,88.65 180 top
R68  470  [0402-RES]  57.15,107.7 180 top
R69  20k  [0402-RES]  15.72,88.62 180 top
R70  12.1k  [0402-RES]  19.05,88.65 180 top
R71  10k  [0402-RES]  12.7,106.43 90 top
R72  10k  [0402-RES]  15.24,106.43 270 top
R73  10k  [0402-RES]  16.51,103.89 270 top
R74  10k  [0402-RES]  15.24,103.89 90 top
R75  1k  [0402-RES]  24.13,106.43 270 top
R76  330  [0402-RES]  115.27,30.99 0 top
R77  330  [0402-RES]  112.01,30.99 0 top
R78  330  [0402-RES]  123.44,30.99 0 top
R79  330  [0402-RES]  119.63,30.99 0 top
R80  10k  [0402-RES]  118.62,34.29 270 top
R81  330  [0402-RES]  77.85,12.83 90 top
R82  330  [0402-RES]  77.98,24.13 270 top
R83  330  [0402-RES]  77.98,26.67 270 top
R84  330  [0402-RES]  77.85,15.37 90 top
R85  330  [0402-RES]  77.98,17.78 90 top
R86  330  [0402-RES]  77.98,29.21 270 top
R87  330  [0402-RES]  77.98,31.75 270 top
R88  330  [0402-RES]  77.98,20.32 90 top
R89  4.7k  [0402-RES]  103.38,8.89 180 top
R90  4.7k  [0402-RES]  103.38,7.62 180 top
R91  4.7k  [0402-RES]  103.38,10.16 180 top
R92  4.7k  [0402-RES]  103.38,11.43 180 top
R93  470  [0402-RES]  126.24,30.48 180 top
R94  20k  [0402-RES]  84.81,11.4 180 top
R95  12.1k  [0402-RES]  88.14,11.43 180 top
R96  10k  [0402-RES]  81.79,29.21 90 top
R97  10k  [0402-RES]  84.33,29.21 270 top
R98  10k  [0402-RES]  85.6,26.67 270 top
R99  10k  [0402-RES]  84.33,26.67 90 top
R100  1k  [0402-RES]  93.22,29.21 270 top
R101  330  [0402-RES]  115.27,69.6 0 top
R102  330  [0402-RES]  112.01,69.6 0 top
R103  330  [0402-RES]  123.44,69.6 0 top
R104  330  [0402-RES]  119.63,69.6 0 top
R105  10k  [0402-RES]  118.62,72.9 270 top
R106  330  [0402-RES]  77.85,51.44 90 top
R107  330  [0402-RES]  77.98,62.74 270 top
R108  330  [0402-RES]  77.98,65.28 270 top
R109  330  [0402-RES]  77.85,53.98 90 top
R110  330  [0402-RES]  77.98,56.39 90 top
R111  330  [0402-RES]  77.98,67.82 270 top
R112  330  [0402-RES]  77.98,70.36 270 top
R113  330  [0402-RES]  77.98,58.93 90 top
R114  4.7k  [0402-RES]  103.38,47.5 180 top
R115  4.7k  [0402-RES]  103.38,46.23 180 top
R116  4.7k  [0402-RES]  103.38,48.77 180 top
R117  4.7k  [0402-RES]  103.38,50.04 180 top
R118  470  [0402-RES]  126.24,69.09 180 top
R119  20k  [0402-RES]  84.81,50.01 180 top
R120  12.1k  [0402-RES]  88.14,50.04 180 top
R121  10k  [0402-RES]  81.79,67.82 90 top
R122  10k  [0402-RES]  84.33,67.82 270 top
R123  10k  [0402-RES]  85.6,65.28 270 top
R124  10k  [0402-RES]  84.33,65.28 90 top
R125  1k  [0402-RES]  93.22,67.82 270 top
R126  330  [0402-RES]  115.27,108.2 0 top
R127  330  [0402-RES]  112.01,108.2 0 top
R128  330  [0402-RES]  123.44,108.2 0 top
R129  330  [0402-RES]  119.63,108.2 0 top
R130  10k  [0402-RES]  118.62,111.51 270 top
R131  330  [0402-RES]  77.85,90.04 90 top
R132  330  [0402-RES]  77.98,101.35 270 top
R133  330  [0402-RES]  77.98,103.89 270 top
R134  330  [0402-RES]  77.85,92.58 90 top
R135  330  [0402-RES]  77.98,95 90 top
R136  330  [0402-RES]  77.98,106.43 270 top
R137  330  [0402-RES]  77.98,108.97 270 top
R138  330  [0402-RES]  77.98,97.54 90 top
R139  4.7k  [0402-RES]  103.38,86.11 180 top
R140  4.7k  [0402-RES]  103.38,84.84 180 top
R141  4.7k  [0402-RES]  103.38,87.38 180 top
R142  4.7k  [0402-RES]  103.38,88.65 180 top
R143  470  [0402-RES]  126.24,107.7 180 top
R144  20k  [0402-RES]  84.81,88.62 180 top
R145  12.1k  [0402-RES]  88.14,88.65 180 top
R146  10k  [0402-RES]  81.79,106.43 90 top
R147  10k  [0402-RES]  84.33,106.43 270 top
R148  10k  [0402-RES]  85.6,103.89 270 top
R149  10k  [0402-RES]  84.33,103.89 90 top
R150  1k  [0402-RES]  93.22,106.43 270 top
S1  SWITCH-MOMENTARY-2SMD  [TACTILE_SWITCH_SMD]  57.15,35.05 0 top
S2  SWITCH-MOMENTARY-2SMD  [TACTILE_SWITCH_SMD]  57.15,73.66 0 top
S3  SWITCH-MOMENTARY-2SMD  [TACTILE_SWITCH_SMD]  57.15,112.27 0 top
S4  SWITCH-MOMENTARY-2SMD  [TACTILE_SWITCH_SMD]  126.24,35.05 0 top
S5  SWITCH-MOMENTARY-2SMD  [TACTILE_SWITCH_SMD]  126.24,73.66 0 top
S6  SWITCH-MOMENTARY-2SMD  [TACTILE_SWITCH_SMD]  126.24,112.27 0 top
SJ1  SOLDERJUMPERNC  [SJ_2S]  62.23,3.81 0 top
SJ2  SOLDERJUMPERNC  [SJ_2S]  62.23,42.42 0 top
SJ3  SOLDERJUMPERNC  [SJ_2S]  62.23,81.03 0 top
SJ4  SOLDERJUMPERNC  [SJ_2S]  131.32,3.81 0 top
SJ5  SOLDERJUMPERNC  [SJ_2S]  131.32,42.42 0 top
SJ6  SOLDERJUMPERNC  [SJ_2S]  131.32,81.03 0 top
STAT1  red  [LED-0603]  54.36,29.72 270 top
STAT2  green  [LED-0603]  50.55,29.72 270 top
STAT3  yellow  [LED-0603]  46.61,29.77 270 top
STAT4  blue  [LED-0603]  42.67,29.77 270 top
STAT5  yellow  [LED-0603]  46.61,68.38 270 top
STAT6  blue  [LED-0603]  42.67,68.38 270 top
STAT7  red  [LED-0603]  54.36,68.33 270 top
STAT8  green  [LED-0603]  50.55,68.33 270 top
STAT9  yellow  [LED-0603]  46.61,106.98 270 top
STAT10  blue  [LED-0603]  42.67,106.98 270 top
STAT11  red  [LED-0603]  54.36,106.93 270 top
STAT12  green  [LED-0603]  50.55,106.93 270 top
STAT13  yellow  [LED-0603]  115.7,29.77 270 top
STAT14  blue  [LED-0603]  111.76,29.77 270 top
STAT15  red  [LED-0603]  123.44,29.72 270 top
STAT16  green  [LED-0603]  119.63,29.72 270 top
STAT17  yellow  [LED-0603]  115.7,68.38 270 top
STAT18  blue  [LED-0603]  111.76,68.38 270 top
STAT19  red  [LED-0603]  123.44,68.33 270 top
STAT20  green  [LED-0603]  119.63,68.33 270 top
STAT21  yellow  [LED-0603]  115.7,106.98 270 top
STAT22  blue  [LED-0603]  111.76,106.98 270 top
STAT23  red  [LED-0603]  123.44,106.93 270 top
STAT24  green  [LED-0603]  119.63,106.93 270 top
TP1  TEST-POINT3  [PAD.03X.03]  42.93,27.56 0 bottom
TP2  TEST-POINT3  [PAD.03X.03]  42.93,20.95 0 bottom
TP3  TEST-POINT3  [PAD.03X.03]  41.91,20.95 0 bottom
TP4  TEST-POINT3  [PAD.03X.03]  38.23,24.26 0 bottom
TP5  TEST-POINT3  [PAD.03X.03]  42.93,66.17 0 bottom
TP6  TEST-POINT3  [PAD.03X.03]  42.93,59.56 0 bottom
TP7  TEST-POINT3  [PAD.03X.03]  41.91,59.56 0 bottom
TP8  TEST-POINT3  [PAD.03X.03]  38.23,62.87 0 bottom
TP9  TEST-POINT3  [PAD.03X.03]  42.93,104.78 0 bottom
TP10  TEST-POINT3  [PAD.03X.03]  42.93,98.17 0 bottom
TP11  TEST-POINT3  [PAD.03X.03]  41.91,98.17 0 bottom
TP12  TEST-POINT3  [PAD.03X.03]  38.23,101.47 0 bottom
TP13  TEST-POINT3  [PAD.03X.03]  112.01,27.56 0 bottom
TP14  TEST-POINT3  [PAD.03X.03]  112.01,20.95 0 bottom
TP15  TEST-POINT3  [PAD.03X.03]  111,20.95 0 bottom
TP16  TEST-POINT3  [PAD.03X.03]  107.31,24.26 0 bottom
TP17  TEST-POINT3  [PAD.03X.03]  112.01,66.17 0 bottom
TP18  TEST-POINT3  [PAD.03X.03]  112.01,59.56 0 bottom
TP19  TEST-POINT3  [PAD.03X.03]  111,59.56 0 bottom
TP20  TEST-POINT3  [PAD.03X.03]  107.31,62.87 0 bottom
TP21  TEST-POINT3  [PAD.03X.03]  112.01,104.78 0 bottom
TP22  TEST-POINT3  [PAD.03X.03]  112.01,98.17 0 bottom
TP23  TEST-POINT3  [PAD.03X.03]  111,98.17 0 bottom
TP24  TEST-POINT3  [PAD.03X.03]  107.31,101.47 0 bottom
U1  DSPIC33FJ256GP710_  [TQFP-100-12X12MM]  41.91,19.05 270 top
U2  DSPIC33FJ256GP710_  [TQFP-100-12X12MM]  41.91,57.66 270 top
U3  V_REG_LDOSMD  [SOT23-5]  20.32,15.24 180 top
U4  V_REG_LDOSMD  [SOT23-5]  20.32,53.85 180 top
U5  V_REG_NCP50X  [DPAK-5]  13.97,19.05 0 top
U6  D2523T_  [EM406]  16.51,7.62 270 top
U7  V_REG_NCP50X  [DPAK-5]  13.97,57.66 0 top
U8  EEPROM-I2CSMD  [SO08]  53.34,10.16 90 top
U9  EM406  [EM406]  21.59,7.62 270 top
U10  MPU-6000QFN-24  [QFN-24-TESTING]  27.94,26.67 270 top
U11  D2523T_  [EM406]  16.51,46.23 270 top
U12  EEPROM-I2CSMD  [SO08]  53.34,48.77 90 top
U13  EM406  [EM406]  21.59,46.23 270 top
U14  MPU-6000QFN-24  [QFN-24-TESTING]  27.94,65.28 270 top
U15  DSPIC33FJ256GP710_  [TQFP-100-12X12MM]  41.91,96.27 270 top
U16  V_REG_LDOSMD  [SOT23-5]  20.32,92.46 180 top
U17  V_REG_NCP50X  [DPAK-5]  13.97,96.27 0 top
U18  D2523T_  [EM406]  16.51,84.84 270 top
U19  EEPROM-I2CSMD  [SO08]  53.34,87.38 90 top
U20  EM406  [EM406]  21.59,84.84 270 top
U21  MPU-6000QFN-24  [QFN-24-TESTING]  27.94,103.89 270 top
U22  DSPIC33FJ256GP710_  [TQFP-100-12X12MM]  111,19.05 270 top
U23  V_REG_LDOSMD  [SOT23-5]  89.41,15.24 180 top
U24  V_REG_NCP50X  [DPAK-5]  83.06,19.05 0 top
U25  D2523T_  [EM406]  85.6,7.62 270 top
U26  EEPROM-I2CSMD  [SO08]  122.43,10.16 90 top
U27  EM406  [EM406]  90.68,7.62 270 top
U28  MPU-6000QFN-24  [QFN-24-TESTING]  97.03,26.67 270 top
U29  DSPIC33FJ256GP710_  [TQFP-100-12X12MM]  111,57.66 270 top
U30  V_REG_LDOSMD  [SOT23-5]  89.41,53.85 180 top
U31  V_REG_NCP50X  [DPAK-5]  83.06,57.66 0 top
U32  D2523T_  [EM406]  85.6,46.23 270 top
U33  EEPROM-I2CSMD  [SO08]  122.43,48.77 90 top
U34  EM406  [EM406]  90.68,46.23 270 top
U35  MPU-6000QFN-24  [QFN-24-TESTING]  97.03,65.28 270 top
U36  DSPIC33FJ256GP710_  [TQFP-100-12X12MM]  111,96.27 270 top
U37  V_REG_LDOSMD  [SOT23-5]  89.41,92.46 180 top
U38  V_REG_NCP50X  [DPAK-5]  83.06,96.27 0 top
U39  D2523T_  [EM406]  85.6,84.84 270 top
U40  EEPROM-I2CSMD  [SO08]  122.43,87.38 90 top
U41  EM406  [EM406]  90.68,84.84 270 top
U42  MPU-6000QFN-24  [QFN-24-TESTING]  97.03,103.89 270 top
U$1  STAND-OFF  [STAND-OFF]  2.54,74.17 0 top
U$2  STAND-OFF  [STAND-OFF]  2.54,35.56 0 top
U$3  STAND-OFF  [STAND-OFF]  2.54,2.54 0 top
U$4  STAND-OFF  [STAND-OFF]  66.04,35.56 0 top
U$5  STAND-OFF  [STAND-OFF]  66.04,2.54 0 top
U$6  STAND-OFF  [STAND-OFF]  2.54,41.15 0 top
U$7  STAND-OFF  [STAND-OFF]  66.04,74.17 0 top
U$8  STAND-OFF  [STAND-OFF]  66.04,41.15 0 top
U$9  OSHW-LOGOS  [OSHW-LOGO-S]  9.53,1.85 0 bottom
U$10  LOGO-SFESK  [SFE-LOGO-FLAME]  53.49,20.21 0 top
U$11  LOGO-SFESK  [SFE-LOGO-FLAME]  53.49,58.81 0 top
U$12  OSHW-LOGOS  [OSHW-LOGO-S]  9.53,40.46 0 bottom
U$13  STAND-OFF  [STAND-OFF]  2.54,112.78 0 top
U$14  STAND-OFF  [STAND-OFF]  2.54,79.76 0 top
U$15  STAND-OFF  [STAND-OFF]  66.04,112.78 0 top
U$16  STAND-OFF  [STAND-OFF]  66.04,79.76 0 top
U$17  LOGO-SFESK  [SFE-LOGO-FLAME]  53.49,97.42 0 top
U$18  OSHW-LOGOS  [OSHW-LOGO-S]  9.53,79.07 0 bottom
U$19  STAND-OFF  [STAND-OFF]  71.63,35.56 0 top
U$20  STAND-OFF  [STAND-OFF]  71.63,2.54 0 top
U$21  STAND-OFF  [STAND-OFF]  135.13,35.56 0 top
U$22  STAND-OFF  [STAND-OFF]  135.13,2.54 0 top
U$23  LOGO-SFESK  [SFE-LOGO-FLAME]  122.58,20.21 0 top
U$24  OSHW-LOGOS  [OSHW-LOGO-S]  78.61,1.85 0 bottom
U$25  STAND-OFF  [STAND-OFF]  71.63,74.17 0 top
U$26  STAND-OFF  [STAND-OFF]  71.63,41.15 0 top
U$27  STAND-OFF  [STAND-OFF]  135.13,74.17 0 top
U$28  STAND-OFF  [STAND-OFF]  135.13,41.15 0 top
U$29  LOGO-SFESK  [SFE-LOGO-FLAME]  122.58,58.81 0 top
U$30  OSHW-LOGOS  [OSHW-LOGO-S]  78.61,40.46 0 bottom
U$31  STAND-OFF  [STAND-OFF]  71.63,112.78 0 top
U$32  STAND-OFF  [STAND-OFF]  71.63,79.76 0 top
U$33  STAND-OFF  [STAND-OFF]  135.13,112.78 0 top
U$34  STAND-OFF  [STAND-OFF]  135.13,79.76 0 top
U$35  LOGO-SFESK  [SFE-LOGO-FLAME]  122.58,97.42 0 top
U$36  OSHW-LOGOS  [OSHW-LOGO-S]  78.61,79.07 0 bottom
Y1  RESONATORSMD  [RESONATOR-SMD]  42.04,8.26 0 top
Y2  RESONATORSMD  [RESONATOR-SMD]  42.04,46.86 0 top
Y3  RESONATORSMD  [RESONATOR-SMD]  42.04,85.47 0 top
Y4  RESONATORSMD  [RESONATOR-SMD]  111.12,8.26 0 top
Y5  RESONATORSMD  [RESONATOR-SMD]  111.12,46.86 0 top
Y6  RESONATORSMD  [RESONATOR-SMD]  111.12,85.47 0 top

## Library data of the parts
C1 C3-C8 C10 C11 C13-C32 C35 C36 C38-C51 C54 C55 C57-C70 C73 C74 C76-C89 C92 C93 C95-C108 C111 C112 C114 I1-I48 INPUT1-INPUT12 JP1-JP8 JP10-JP17 JP20-JP35 JP39-JP54 JP58-JP73 JP77-JP92 JP96-JP111 MPU MPU1-MPU5 O1-O48 OUTPUT1-OUTPUT12 R1-R150 S1-S6 SJ1-SJ6 STAT1-STAT24 U1-U9 U11-U13 U15-U20 U22-U27 U29-U34 U36-U41 U$1-U$36 Y1-Y6 = SparkFun
C2 C9 C12 C33 C34 C37 C52 C53 C56 C71 C72 C75 C90 C91 C94 C109 C110 C113 = SparkFun-Capacitors
JP9 JP38 JP57 JP76 JP95 JP114 = SparkFun-Connectors
JP18 JP19 JP36 JP37 JP55 JP56 JP74 JP75 JP93 JP94 JP112 JP113 = abes
LOGO1-LOGO6 = SparkFun-Aesthetics
TP1-TP24 = SparkFun-Passives
U10 U14 U21 U28 U35 U42 = SparkFun-Sensors